# Altium PCB Rover_Motor_Driver.PcbDoc
Units mm, origin at the board's own origin, x right, y up, seen from the top; angles counter-clockwise.
Board outline 88.23 x 51.47 mm, 2 copper layers (Top Layer, Bottom Layer); 32 components, 17 nets, 86 pads, 25 vias.
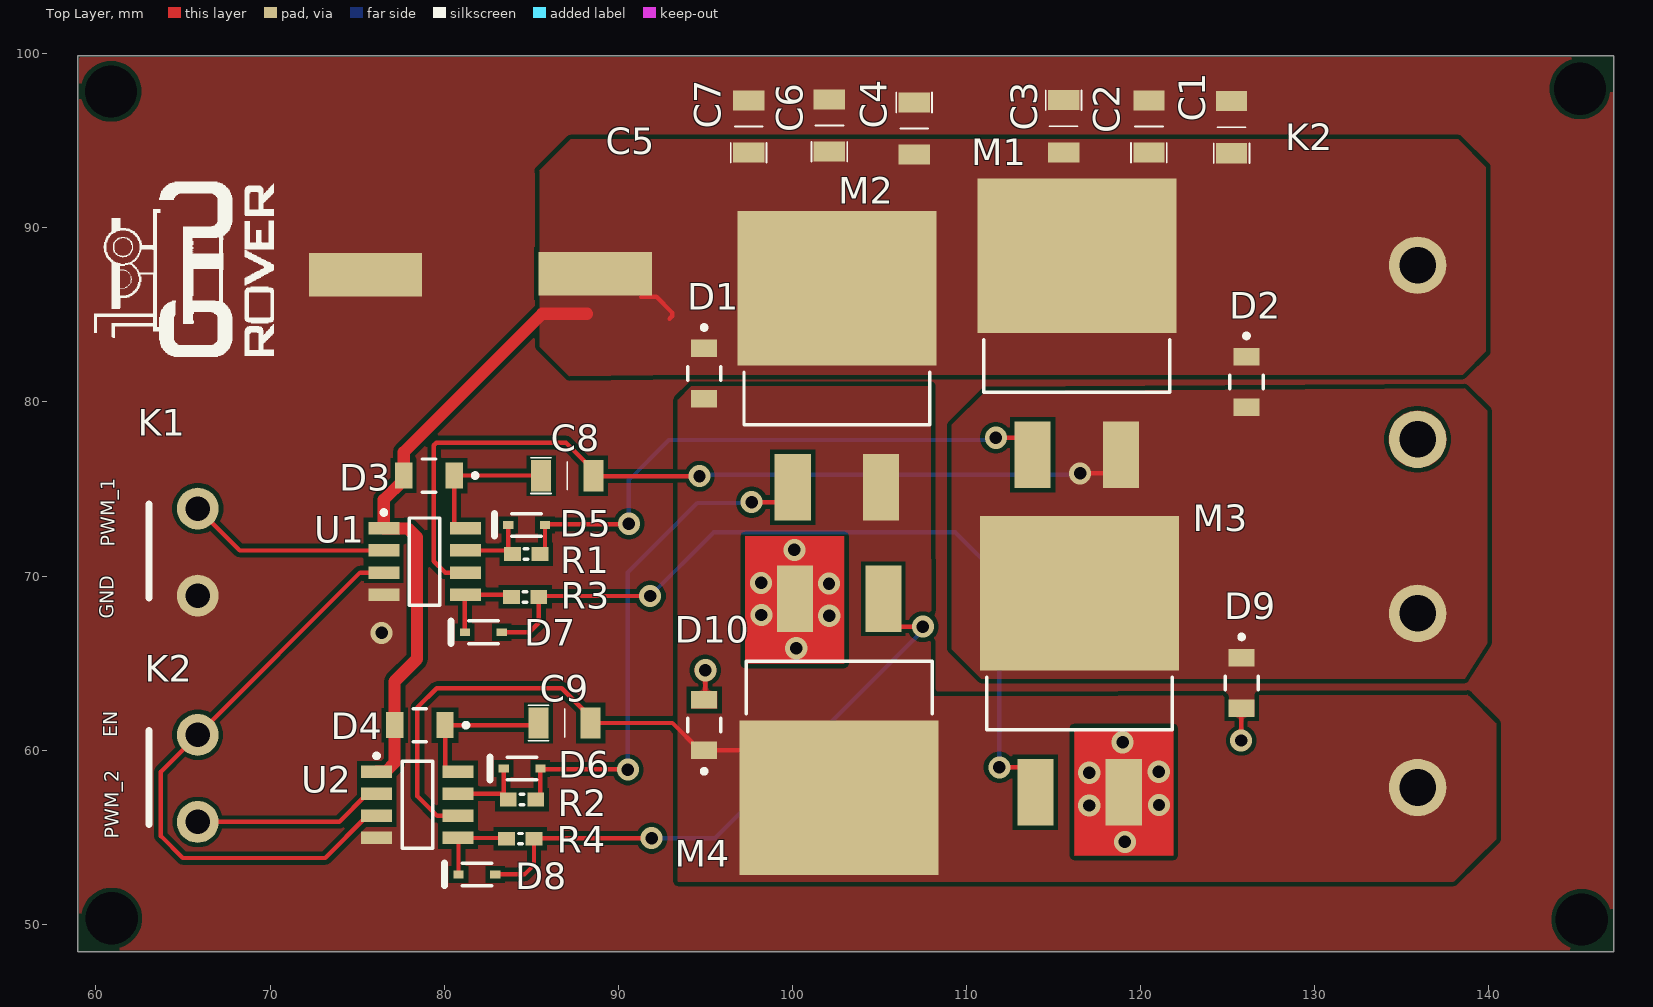
[diagram p0: Top Layer view]
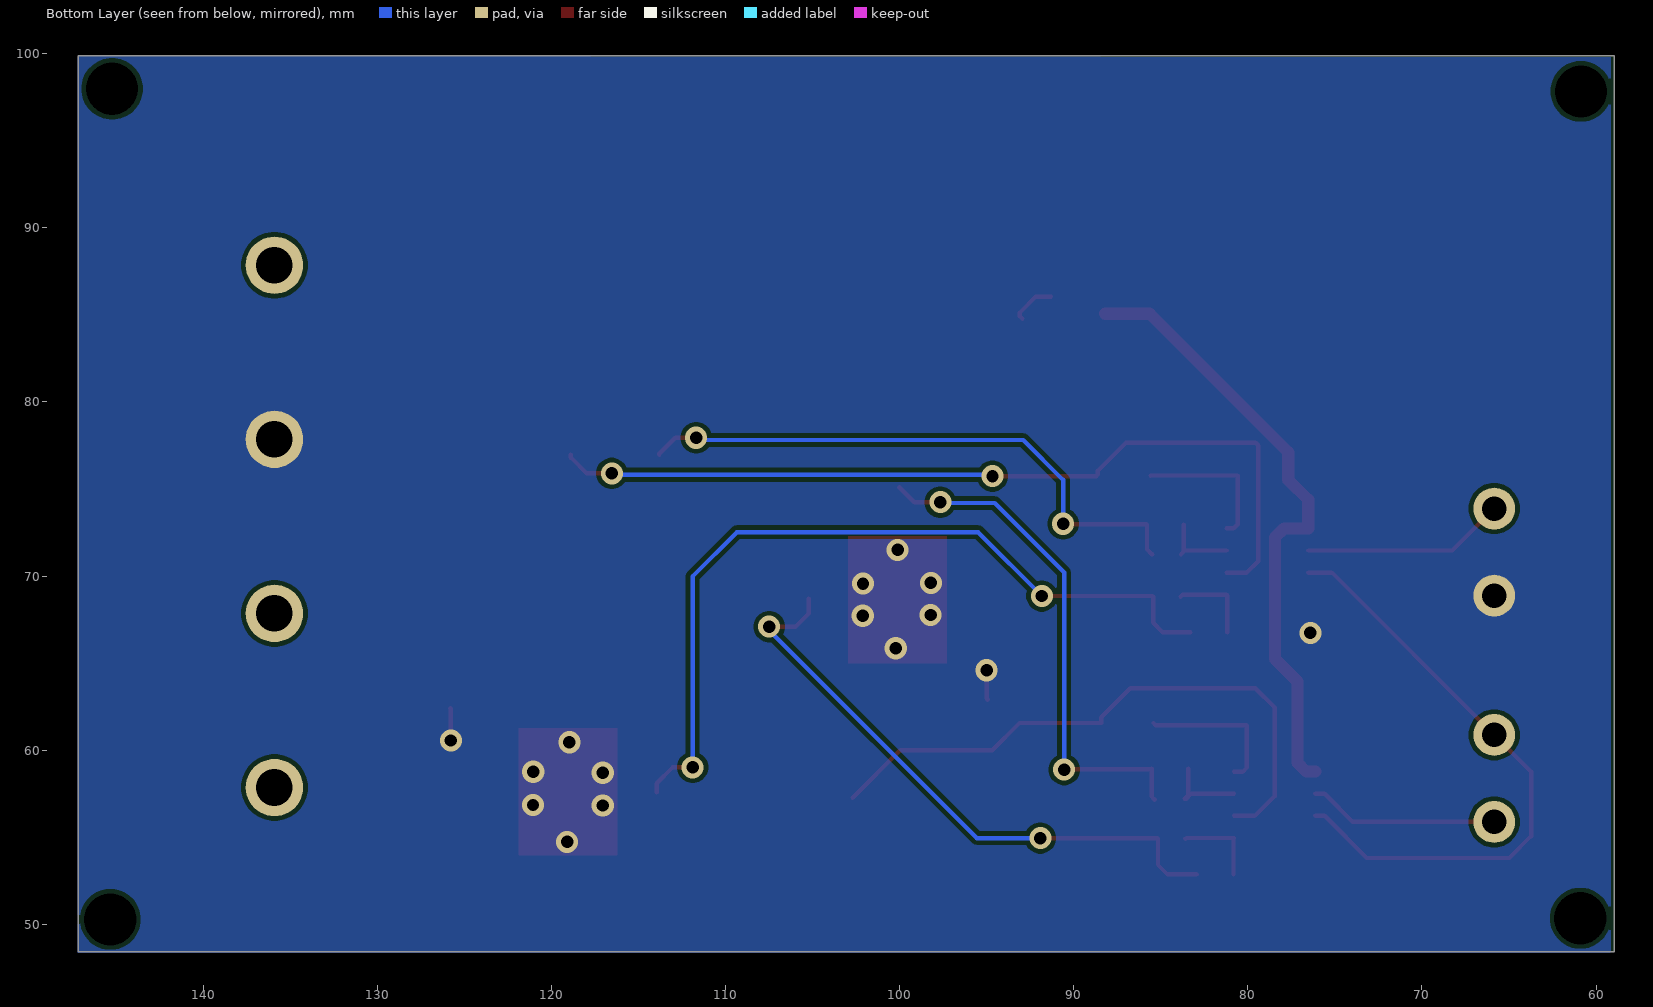
[diagram p1: Bottom Layer view, seen from below]
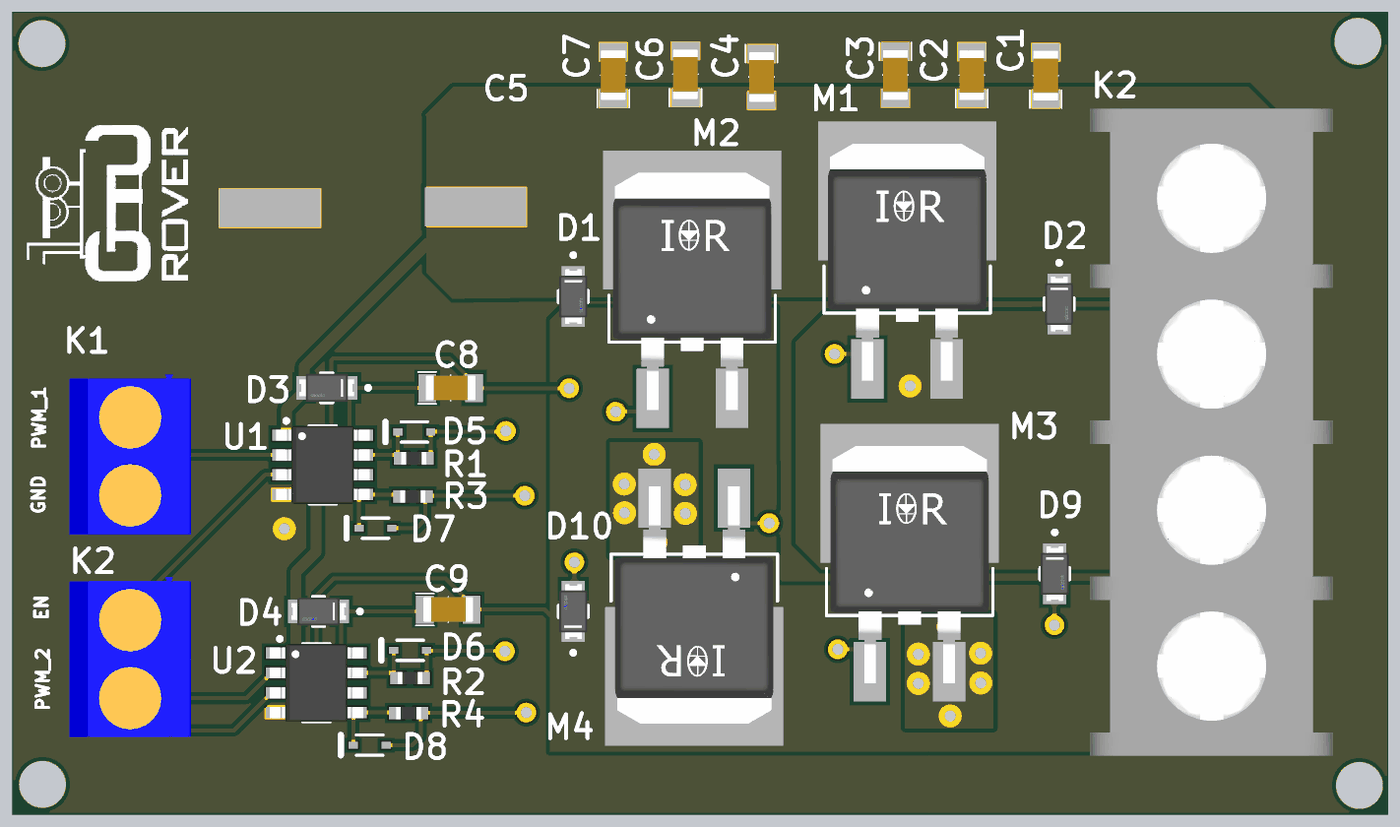
[diagram p2: 3D render of the assembled board from above, using the file's embedded part models]

## Layer stack, top to bottom
Top Solder: solder mask 0.0102, Solder Resist, Dk 3.5
Top Layer: signal copper 0.0356
Dielectric 1: dielectric 0.32, FR-4, Dk 4.8
Bottom Layer: signal copper 0.0356
Bottom Solder: solder mask 0.0102, Solder Resist, Dk 3.5

## Board outline
58.961,48.407 58.961,99.88 147.187,99.88 147.187,48.407

## Design rules (kind name [scope] priority, off if disabled: settings)
Clearance [All] p1: gap=0.254 ignorepadtopadclearanceinfootprint=FALSE except(0: Arc-Hole Track-Hole SMDPad-Hole THPad-Hole Via-Hole Fill-Hole Poly-Hole Region-Hole Text-Hole)
PlaneConnect [All] p1: planeconnectstyle=Direct reliefexpansion=0.508 reliefentries=4 reliefconductorwidth=0.254 reliefairgap=0.254
PolygonConnect [All] p1: connectstyle=Direct reliefconductorwidth=0.254 reliefentries=4 polygonreliefangle="90 Angle" airgapwidth=0.254
RoutingVias [All] p1: holewidth=0.711 width=1.27 viastyle="Through Hole" minholewidth=0.711 minwidth=1.27 maxholewidth=0.711 maxwidth=1.27
SolderMaskExpansion [All] p1: expansion=0.102 istentingtop=FALSE
Width [All] p1: maxlimit=1 minlimit=0.254 preferedwidth=0.3 minimp=50.000000 maximp=50.000000 favimp=50.000000
29 further rules are at their usual default settings.

## Components (designator, comment, footprint, x,y, rotation, side; value= is the part's Value field where it differs from the comment)
C1 "10uF" C1206 125.254,95.813 r90 top
C2 "10uF" C1206 120.509,95.845 r90 top
C3 "100nF" C1206 115.557,95.813 r270 top
C4 "100nF" C1206 106.976,95.679 r270 top
C5 "1000uF - 50V" "1000uF 50V Capacitor" 81.904,87.122 r180 top
C6 "470nF-100V" C1206 102.153,95.903 r90 top
C7 "470nF-100V" C1206 97.518,95.843 r90 top
C8 "1uF" C1206 87.093,75.743 r0 top
C9 "1uF" C1206 86.945,61.535 r0 top
D1 "1N5819" 1N5819 94.884,81.654 r270 top
D2 "1N5819" 1N5819 126.037,81.169 r270 top
D3 "1N5819" 1N5819 79.153,75.825 r180 top
D4 "1N5819" 1N5819 78.626,61.485 r180 top
D5 "1N4148" 1N4148 84.739,72.942 r180 top
D6 "1N4148" 1N4148 84.475,58.944 r180 top
D7 "1N4148" 1N4148 82.249,66.776 r180 top
D8 "1N4148" 1N4148 81.879,52.863 r180 top
D9 "1N5819" 1N5819 125.756,63.88 r270 top
D10 "1N5819" 1N5819 94.984,61.412 r90 top
K1 "Connector_2" DG126-Konnektör 65.949,71.477 r90 top
K2 "Connector_1" DG126-Konnektör 65.949,58.477 r90 top
K2 "Barrier Connector" DG55C 135.888,57.88 r0 top
M1 "IRF3205" IRF3205 116.292,85.162 r0 top
M2 "IRF3205" IRF3205 102.509,83.291 r0 top
M3 "IRF3205" IRF3205 116.45,65.766 r0 top
M4 "IRF3205" IRF3205 102.742,60.515 r180 top
R1 "27R" R0603 84.71,71.26 r0 top
R2 "27R" R0603 84.473,57.155 r0 top
R3 "27R" R0603 84.65,68.809 r0 top
R4 "27R" R0603 84.374,54.913 r0 top
U1 "Half Bridge Driver IC" IR2104 78.875,70.836 r0 top
U2 "Half Bridge Driver IC" IR2104 78.457,56.862 r0 top

## Footprints (in the part's own frame and the unit in brackets; to place one, negate y for a bottom-side part, rotate by r counter-clockwise, add the part's x,y. Pads: shape width x height; smd on the part's side, far side on the other; paste and mask are expansions set on the pad)
1N4148 [mm]
  rect 0.59x0.45 smd: 1(-1.055,0) 2(1.055,0)
  silkscreen extent -0.85,-0.65 1.85,0.65, body extent -0.85,-0.65 0.85,0.65, height 1.2
1N5819 [mm] "Diode"
  rect 1x1.5 smd paste+0 mask+0: 1(-1.425,0.05) 2(1.475,0.05)
  silkscreen extent -2.75,-0.9 0.41,1, body extent -2.02,-1 2.07,1.1, height 0.25
"1000uF 50V Capacitor" [mm]
  rect 6.5x2.5 smd mask+0.05: 1(-6.775,-0.25) 2(6.425,-0.175)
  body extent -9.23,-8.8 9.17,8.2, height 16.5
C1206 [mm]
  rect 1.15x1.8 smd mask+0.05: 1(-1.525,0.025) 2(1.475,0.025)
  silkscreen extent -2.1,-1 -0.02,1.05, body extent -1.62,-0.77 1.58,0.83, height 1
DG55C [mm] "PCB Güç Konnektör"
  round 3.3 hole 2.1: 1(0.025,-0.025) 2(0.025,9.975) 3(0.025,19.975) 4(0.025,29.975)
  body extent -7.83,-5.7 7.77,35.8, height 20.25
DG126-Konnektör [mm]
  round 2.4 hole 1.4: 1(-2.6,0.1) 2(2.4,0.1)
  silkscreen extent -2.75,2.9 2.65,2.9, body extent -5.1,-4.48 5.15,3.32, height 10.7
IR2104 [mm] "H-bridge MOSFET Driver"
  rect 1.78x0.72 smd: 1(-2.34,1.905) 2(-2.34,0.635) 3(-2.34,-0.635) 4(-2.34,-1.905) 5(2.34,-1.905) 6(2.34,-0.635) 7(2.34,0.635) 8(2.34,1.905)
  silkscreen extent -2.46,-2.5 0.87,2.94, body extent -3,-2.5 3,2.5, height 1.75
IRF3205 [mm] "MOSFET"
  rect 2.08x3.81 smd paste+0 mask+0: 1(-2.49,-8.189) 3(2.59,-8.189)
  rect 11.43x8.89 smd paste+0 mask+0: 2(0.05,3.241)
  silkscreen extent -5.29,-4.6 5.39,-1.58, body extent -5.76,-10.19 5.86,7.79, height 0.25
R0603 [mm] "Resistor 27R"
  rect 0.965x0.8 smd: 1(-0.787,0) 2(0.788,0)
  silkscreen extent -0.1,-0.3 0.1,0.3, body extent -0.8,-0.4 0.8,0.4, height 0.5

## Part data
K2: library part DG55C
U1 U2: library part IR2104

## Free pads (board coordinates)
  round 0 hole 3: 4(60.866,97.842) 4(60.901,50.346) 4(145.242,97.988) 4(145.339,50.278)

## Via types
v1: diameter 1.27, hole 0.711, Top Layer to Bottom Layer, 25 vias

## Nets (pads, with @x,y where several pads share a name; then routed paths per layer and width w, separated by ;. In a path a pad name is that pad's centre, name@x,y a point inside that pad or via, vN(x,y) a via of type N, cw(c..) or ccw(c..) an arc to the next point about the centre after c; other vN are vias at no path point)
EN: K2.2@65.849,60.877 U1.3 U2.3 | length 35.1
  Top Layer w0.254: U2.3 75.587,56.227 73.169,53.808 64.99,53.808 63.733,55.065 63.733,58.761 65.849,60.877 75.173,70.201 U1.3
GND: C1.2 C2.2 C3.1 C4.1 C5.2 C6.2 C7.2 D9.2 D10.2 K1.1 K2.3 M3.3 M4.3 U1.4 U2.4 | length 3.6
  Top Layer w0.254: D10.2 95.005,62.958 v1(95.005,64.592) ; v1(125.781,60.555) 125.781,62.381 D9.2
  other v1: 119.102,54.733 117.058,56.821 121.061,56.85 117.058,58.701 121.05,58.76 118.973,60.453 100.227,65.855 76.408,66.737 102.119,67.719 98.22,67.761 102.105,69.563 98.206,69.606 100.12,71.506
NetC8_1: C8.1 D3.1 U1.8 | length 8.5
  Top Layer w0.254: U1.8 80.811,72.741 80.578,72.974 D3.1 85.561,75.775 C8.1
NetC8_2: C8.2 D2.2 D9.1 K2.2@135.913,67.855 M1.3 M3.2 U1.6 | length 49.8
  Top Layer w0.254: U1.6 80.055,70.201 79.406,70.85 79.406,77.512 79.555,77.661 87,77.661 88.622,76.039 88.622,75.823 88.701,75.744 v1(94.668,75.744) ; v1(116.53,75.895) 117.969,75.895 118.882,76.808 M1.3
  Bottom Layer w0.254: v1(94.668,75.744) 94.744,75.819 116.454,75.819 v1(116.53,75.895)
NetC9_1: C9.1 D4.1 U2.8 | length 8.7
  Top Layer w0.254: U2.8 80.284,58.767 80.051,59 D4.1 85.295,61.435 C9.1
NetC9_2: C9.2 D1.2 D10.1 K2.1@135.913,57.855 M2.3 M4.2 U2.6 | length 35.4
  Top Layer w0.254: U2.6 79.592,56.227 78.457,57.362 78.457,62.446 79.568,63.556 86.749,63.556 88.42,61.885 C9.2 93.111,61.56 94.684,59.987 D10.1 99.978,59.987 M4.2
NetD5_1: D5.1 M1.1 R1.2 | length 33.8
  Top Layer w0.254: R1.2 85.521,71.26 85.794,71.533 D5.1 85.826,72.973 90.581,72.973 v1(90.612,73.004) ; v1(111.69,77.945) 112.889,77.945 113.802,77.032 M1.1
  Bottom Layer w0.254: v1(90.612,73.004) 90.612,75.525 92.905,77.818 111.563,77.818 v1(111.69,77.945)
NetD5_2: D5.2 R1.1 U1.7 | length 4.2
  Top Layer w0.254: U1.7 83.629,71.471 R1.1@83.84,71.26 ; R1.1@83.684,71.46 D5.2
NetD6_1: D6.1 M2.1 R2.2 | length 29.7
  Top Layer w0.254: R2.2@85.343,57.155 85.53,57.342 D6.1 85.559,58.915 90.521,58.915 v1(90.55,58.885) ; v1(97.662,74.245) 99.161,74.245 M2.1
  Bottom Layer w0.254: v1(90.55,58.885) 90.55,70.205 94.541,74.196 97.613,74.196 v1(97.662,74.245)
NetD6_2: D6.2 R2.1 U2.7 | length 4.8
  Top Layer w0.254: U2.7 83.261,57.497 83.542,57.215 83.624,57.215 83.42,57.42 D6.2
NetD7_1: D7.1 M3.1 R3.2 | length 46.8
  Top Layer w0.254: D7.1 84.897,66.776 85.438,67.316 R3.2 85.483,68.854 v1(91.828,68.854) ; v1(111.893,59.009) 113.047,59.009 113.96,58.096 M3.1
  Bottom Layer w0.254: v1(91.828,68.854) 95.498,72.523 109.35,72.523 111.893,69.98 v1(111.893,59.009)
NetD7_2: D7.2 R3.1 U1.5 | length 4.9
  Top Layer w0.254: D7.2 81.194,68.91 U1.5 83.741,68.931 R3.1
NetD8_1: D8.1 M4.1 R4.2 | length 34.9
  Top Layer w0.254: D8.1 84.615,52.863 85.162,53.409 R4.2 85.199,54.95 v1(91.92,54.95) ; M4.1 105.232,67.838 105.972,67.098 v1(107.497,67.098)
  Bottom Layer w0.254: v1(91.92,54.95) 95.568,54.95 107.497,66.879 v1(107.497,67.098)
NetD8_2: D8.2 R4.1 U2.5 | length 4.9
  Top Layer w0.254: D8.2 80.824,54.93 U2.5 83.543,54.957 R4.1
NetK1_2: K1.2 U1.2 | length 11.7
  Top Layer w0.254: K1.2 68.256,71.471 U1.2
NetK2_1: K2.1@65.849,55.877 U2.2 | length 10.9
  Top Layer w0.254: K2.1@65.849,55.877 73.968,55.877 75.587,57.497 U2.2
VCC: C1.1 C2.1 C3.2 C4.2 C5.1 C6.1 C7.1 D1.1 D2.1 D3.2 D4.2 K2.4 M1.2 M2.2 U1.1 U2.1 | length 38.1
  Top Layer w0.254: 91.305,86.039 92.191,86.039 93.094,85.137 93.094,84.926 92.945,84.777
  Top Layer w0.7: U2.1 76.647,58.767 77.151,59.27 D4.2 77.151,63.952 78.436,65.236 78.436,72.225 77.931,72.731 76.545,72.731 U1.1 76.535,74.382 77.678,75.525 D3.2 77.678,77.114 85.633,85.069 88.209,85.069

## Polygon pours and split planes (outlines as drawn)
GND on Top Layer "GND_L01_P011" (solid, pour order 11): 147.118,99.808 147.118,48.41 147.007,48.521 59.039,48.521 59.039,99.826
NetC9_2 on Top Layer "NETC9_2_L01_P010" (solid, pour order 10): 138.871,63.18 138.871,63.098 140.432,61.538 140.432,54.885 137.999,52.452 93.425,52.452 93.425,80.116 94.222,80.913 107.956,80.913 107.956,71.215 107.971,70.73 107.971,70.187 107.956,63.098
NetC8_2 on Top Layer "NETC8_2_L01_P004" (solid, pour order 4): 138.616,80.792 138.619,80.792 139.904,79.506 139.904,66.146 138.616,64.115 110.851,64.115 109.167,65.799 109.167,78.683 111.103,80.619
VCC on Top Layer "VCC_L01_P000" (solid, pour order 0): 94.373,81.568 138.498,81.568 138.501,81.565 139.839,82.903 139.839,93.496 138.254,95.081 87.259,95.081 85.454,93.277 85.499,93.232 85.499,83.186 87.196,81.489
GND on Bottom Layer "GND_L02_P012" (solid, pour order 12): 147.128,99.876 147.203,99.8 147.203,48.357 59.07,48.357 59.146,48.433 59.146,99.8

## Other copper
Top Layer:
  rectangle net GND: 97.291,64.971 102.98,72.291
  rectangle net GND: 116.194,53.942 121.883,61.263

## Silkscreen, mask and mechanical layers (free items; w line width, h text height)
Top Overlay:
  drawing of 7 lines, arcs and shapes, not listed
  text "PWM_1" at 61.07,71.68 h0.8 r90
  text "GND" at 61.023,67.547 h0.8 r90
  text "EN" at 61.215,60.733 h0.8 r90
  text "PWM_2" at 61.302,54.923 h0.8 r90